# EAGLE board sn74ahc125-breakout (EAGLE 5.10)
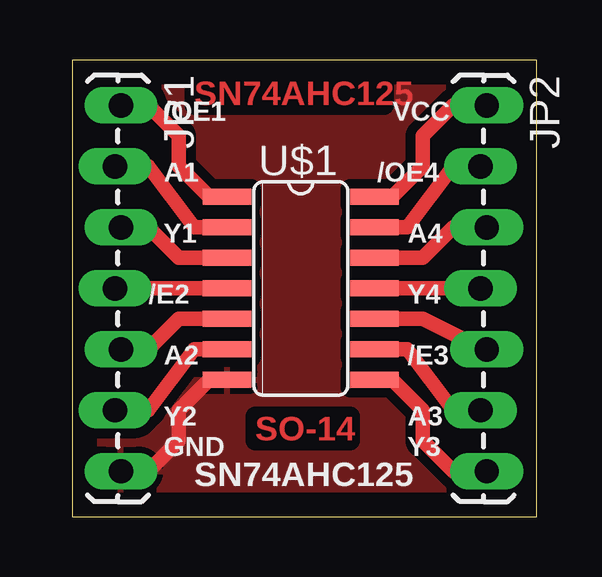
[diagram p0: board, top side]
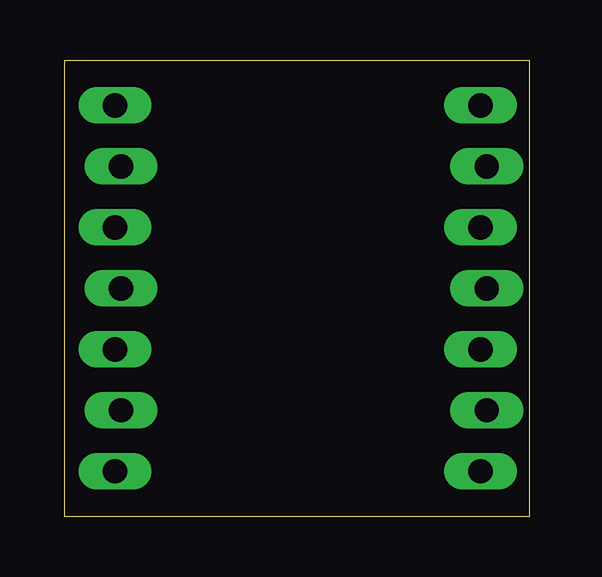
[diagram p1: board, bottom side, seen from below]

Size 19.36 x 19.04 mm. Coordinates in mm from the lower left corner, seen from the top.
Outline: 0,0 19.36,0 19.36,19.04 0,19.04 0,0
Copper layers (1*16): Top 0.035mm / dielectric 1.5mm / Bottom 0.035mm
Design rules "default": minimum track width 10mil, minimum drill 24mil, track to track 8mil, track to pad 8mil, pad to pad 8mil, via to via 8mil, smd to smd 8mil, copper to edge 40mil, drill to drill 8mil, minimum pad ring 10mil, minimum via ring 8mil, stop-mask expansion 4mil, vias tented up to drill 0mil, thermal gap 10mil

## Footprints (pad centres in the part's own frame; a part is rotated, then mirrored left to right if it is on the bottom)
1X07_LOCK_LONGPADS = drill 1.016 long: 1 0,0.127; 2 2.54,-0.127; 3 5.08,0.127; 4 7.62,-0.127; 5 10.16,0.127; 6 12.7,-0.127; 7 15.24,0.127
SO14 = smd 0.66 x 2.032: 1 -3.81,-3.073; 2 -2.54,-3.073; 3 -1.27,-3.073; 4 0,-3.073; 5 1.27,-3.073; 6 2.54,-3.073; 7 3.81,-3.073; 8 3.81,3.073; 9 2.54,3.073; 10 1.27,3.073; 11 0,3.073; 12 -1.27,3.073; 13 -2.54,3.073; 14 -3.81,3.073

## Placement (x,y rotation side)
JP1  [1X07_LOCK_LONGPADS]  1.91,17.15 270 top
JP2  [1X07_LOCK_LONGPADS]  17.14,17.15 270 top
U$1  SN74AHC125  [SO14]  9.53,9.53 270 top

## Library data of the parts
JP1 JP2 = SparkFun
U$1 = ideabot

## Nets
GND: JP1.7 U$1.7
N$1: JP1.1 U$1.1
N$2: JP1.2 U$1.2
N$3: JP1.3 U$1.3
N$4: JP1.4 U$1.4
N$5: JP1.5 U$1.5
N$6: JP1.6 U$1.6
N$8: JP2.1 U$1.14
N$9: JP2.2 U$1.13
N$10: JP2.3 U$1.12
N$11: JP2.4 U$1.11
N$12: JP2.5 U$1.10
N$13: JP2.6 U$1.9
N$14: JP2.7 U$1.8

## Tracks (layer width: path | path; a pad name or v marks a point on that pad's centre or on a via)
GND
  Top 0.406: 5.71,5.71 U$1.7 | JP1.7 3.17,1.91
  Top 0.61: 5.71,5.71 4.45,4.45 4.45,3.17 3.17,1.91
  pour Top (isolate 0.406): 0,0.64 0,18.42 19.05,18.42 19.05,0.64
N$1
  Top 0.406: 5.71,13.33 U$1.1
  Top 0.61: 5.71,13.33 4.45,14.61 4.45,15.88 3.17,17.15 JP1.1
N$2
  Top 0.61: U$1.2 5.08,12.06 3.17,14.61 JP1.2
N$3
  Top 0.61: U$1.3 4.45,10.79 3.17,12.06 JP1.3
N$4  (via drill 0.51)
  Top 0.61: v1.91,9.53 U$1.4
  Bottom 0.254: JP1.4 v1.91,9.53
N$5
  Top 0.61: U$1.5 4.45,8.26 3.17,6.98 JP1.5
N$6
  Top 0.406: JP1.6 3.17,4.45
  Top 0.61: U$1.6 5.08,6.98 3.17,4.45
N$8
  Top 0.406: U$1.14 13.34,13.33
  Top 0.61: 13.34,13.33 14.61,14.61 14.61,15.88 15.88,17.15 JP2.1
N$9
  Top 0.406: 15.88,14.61 JP2.2
  Top 0.61: U$1.13 13.97,12.06 15.88,14.61
N$10
  Top 0.61: U$1.12 14.61,10.79 15.88,12.06 JP2.3
N$11
  Top 0.61: U$1.11 JP2.4
N$12
  Top 0.406: 17.14,6.98 JP2.5
  Top 0.61: U$1.10 14.61,8.26 17.14,6.98
N$13
  Top 0.61: U$1.9 13.97,6.98 15.88,4.45 JP2.6
N$14
  Top 0.406: 13.34,5.71 U$1.8 | JP2.7 15.88,1.91
  Top 0.61: 13.34,5.71 14.61,4.45 14.61,3.17 15.88,1.91

## Text on the board
Top: SN74AHC125 | SO-14
tPlace: /OE1 | VCC | A1 | /OE4 | Y1 | A4 | /E2 | Y4 | A2 | /E3 | Y2 | A3 | GND | Y3 | SN74AHC125
tNames: /OE1